# Altium PCB EVB_WUS_V1.0.0.PcbDoc
Units mil, origin at the board's own origin, x right, y up, seen from the top; angles counter-clockwise.
Board outline 6000 x 4000 mil, 2 copper layers (Top, Bottom), stack 12.7 mil thick; 16 components, 6 nets, 77 pads, 82 vias.
Unrouted connection lines stored in the file: 75.
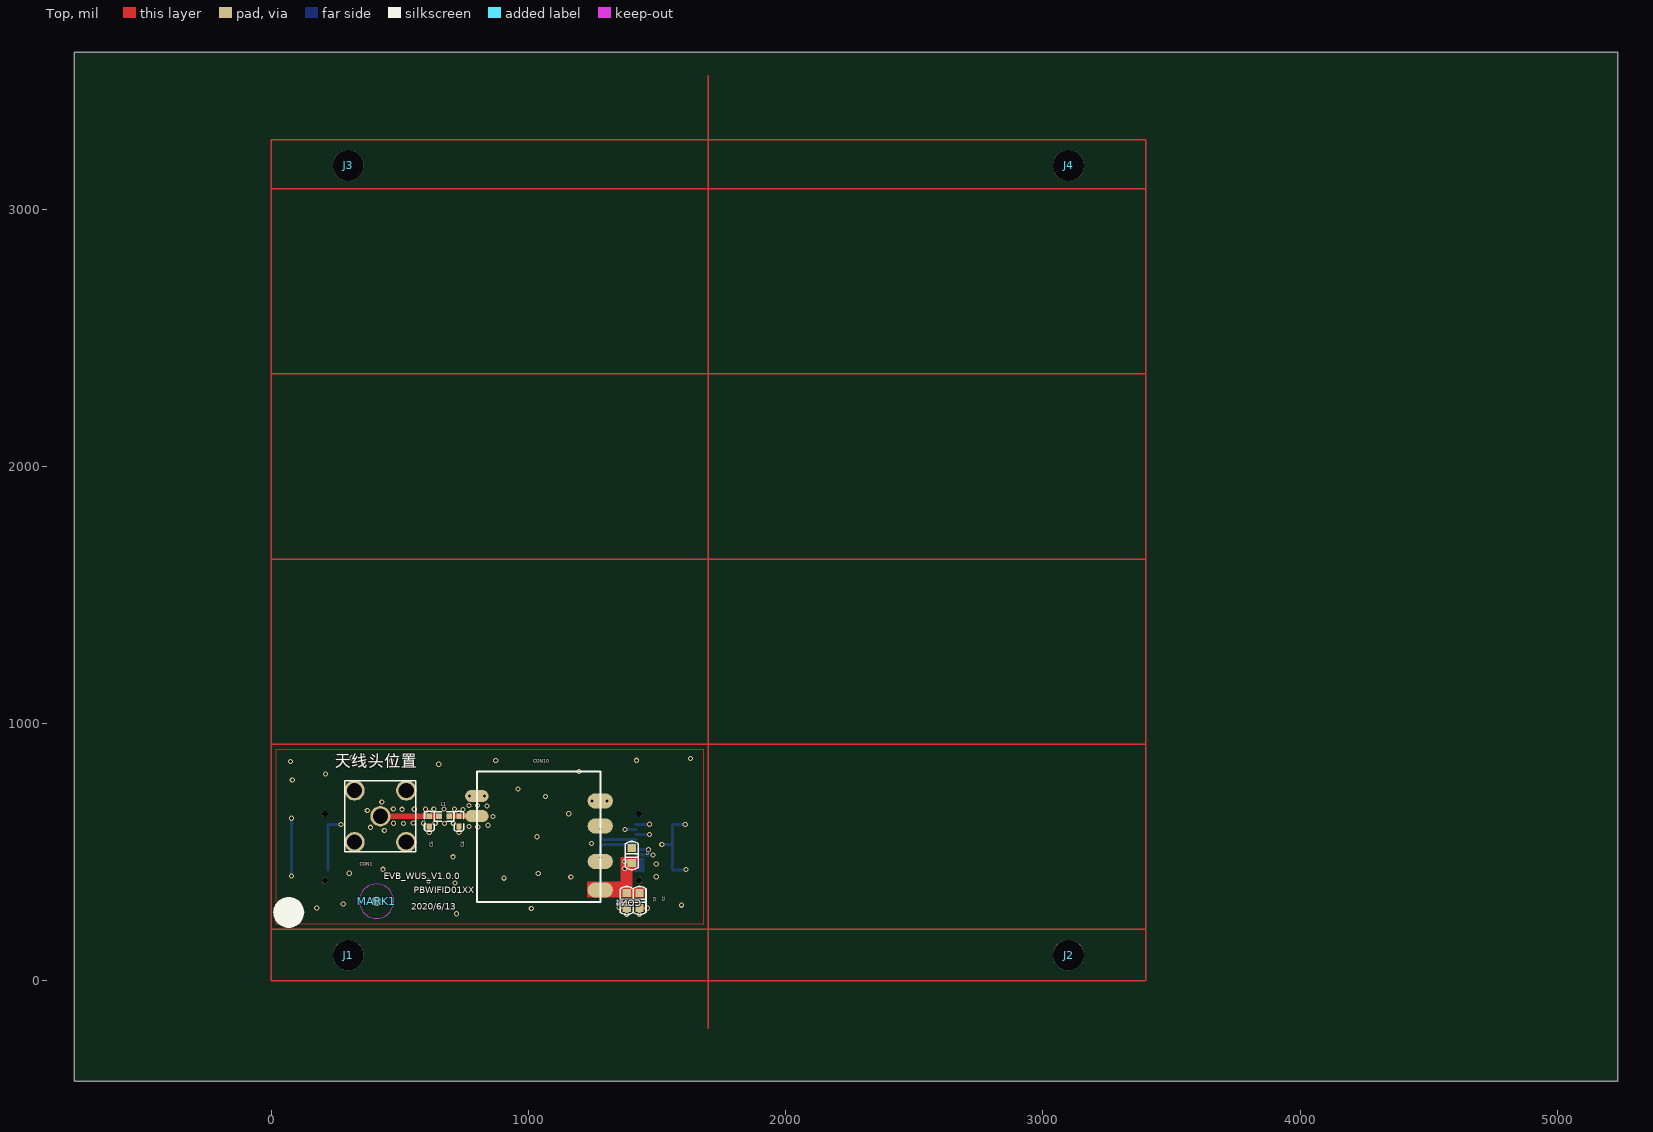
[diagram p0: Top view]
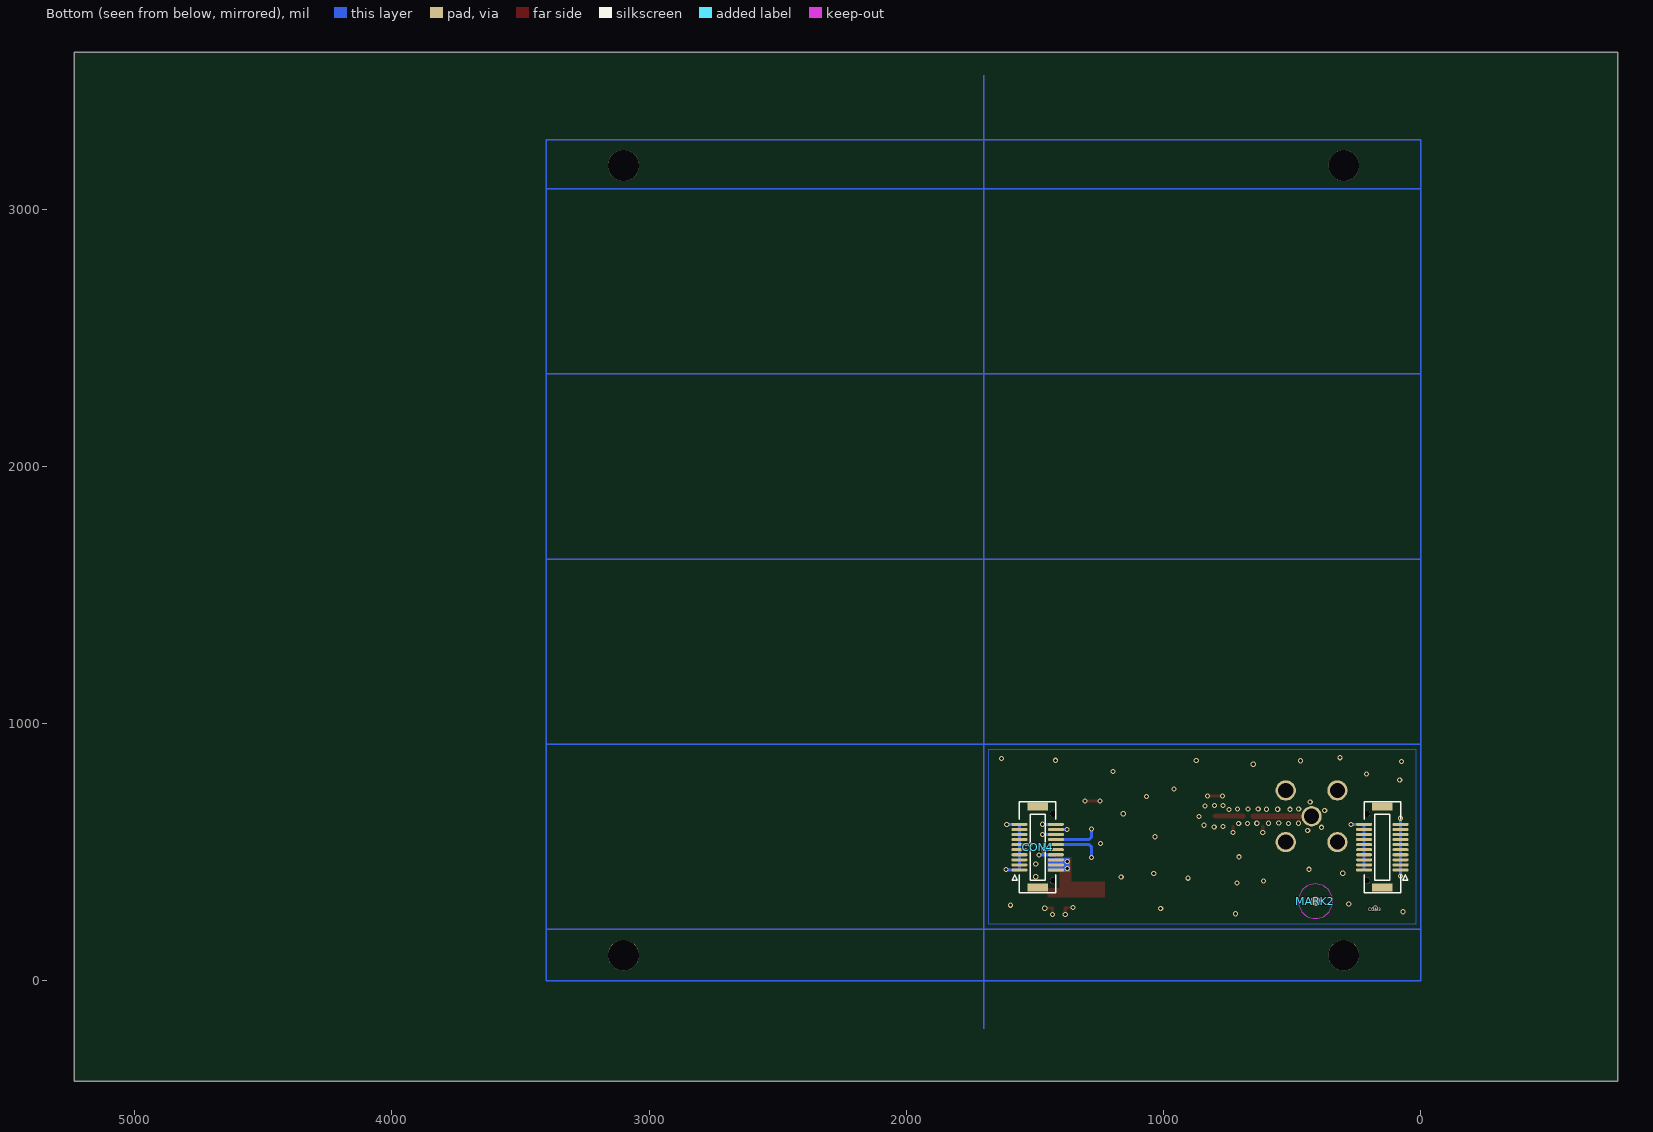
[diagram p1: Bottom view, seen from below]

## Layer stack, top to bottom
Solder Mask Top: solder mask 0.4, Solder Resist, Dk 3.5
Top: signal copper 1.35
Dielectric 1: dielectric 10, FR-4, Dk 4.3
Bottom: signal copper 1.35
Solder Mask Bottom: solder mask 0.4, Solder Resist, Dk 3.5

## Board outline
-765,-390 5235,-390 5235,3610 -765,3610

## Design rules (kind name [scope] priority, off if disabled: settings)
Clearance "Clearance - NetClass - ClearanceClass_2(RuleSet)" [InNetClass('ClearanceClass_2(RuleSet)')] p1: gap=6 ignorepadtopadclearanceinfootprint=FALSE except(0: Arc-Hole Track-Hole SMDPad-Hole THPad-Hole Via-Hole Fill-Hole Poly-Hole Region-Hole Text-Hole; 8: Arc-Fill Arc-Poly Arc-Region Track-Fill Track-Poly Track-Region SMDPad-Fill SMDPad-Poly SMDPad-Region THPad-Fill THPad-Poly THPad-Region Via-Fill Via-Poly Via-Region Fill-Fill Fill-Poly Fill-Region Poly-Poly Poly-Region Region-Region; 10: Text-Text)
Clearance "Clearance - Default - DEFAULT- SMD" [IsVia vs IsSMTPin] p2: gap=6 ignorepadtopadclearanceinfootprint=FALSE
Clearance "Clearance - Default - DEFAULT - Via" [IsVia vs IsVia] p3: gap=6 ignorepadtopadclearanceinfootprint=FALSE
Clearance "Clearance - Default - DEFAULT - Net" [All] p4: gap=6 ignorepadtopadclearanceinfootprint=FALSE except(0: Arc-Hole Track-Hole SMDPad-Hole THPad-Hole Via-Hole Fill-Hole Poly-Hole Region-Hole Text-Hole; 10: Text-Text)
ComponentClearance "ComponentClearance - Default - DEFAULT" [All] p1: gap=6 collisioncheckmode=3 verticalgap=10 showdistances=FALSE
FanoutControl Fanout_Small [(CompPinCount < 5)] p3: bgadir=Out bgaviamode=Centered fanoutstyle=Auto fanoutdirection=OutThenIn viagrid=1 // Fanout_Small (Default Rule)
FanoutControl Fanout_SOIC [IsSOIC] p4: bgadir=Out bgaviamode=Centered fanoutstyle=Auto fanoutdirection=Alternating viagrid=1 // Fanout_SOIC (Default Rule)
HoleToHoleClearance "HoleToHoleClearance - Default - DEFAULT" [All] p1: gap=6 allowstackedmicrovias=TRUE
Length "Default Length" [All] p1: maxlimit=50000 minlimit=0
MaxMinImpedance "Default Impedance" [All] p1: minimum=50.00 maximum=150.0
ParallelSegment "Default Parallel Segment Same Layer" [All] p1: limit=1000 gap=200
ParallelSegment "Default Parallel Segment Adjasent" [All] p2: limit=1000 gap=200
PlaneConnect "Default PlaneConnect" [All] p1: planeconnectstyle=Relief reliefexpansion=20 reliefentries=4 reliefconductorwidth=15 reliefairgap=10
PolygonConnect "PolygonConnect - Default SMT" [IsSMTPin] p1: connectstyle=Direct reliefconductorwidth=10 reliefentries=4 polygonreliefangle="45 Angle" airgapwidth=10
PolygonConnect "PolygonConnect - Default Pad" [All] p2: connectstyle=Relief reliefconductorwidth=15 reliefentries=4 polygonreliefangle="45 Angle" airgapwidth=10
RoutingLayers "RoutingLayers - Default - DEFAULT" [All] p1: top layer_v5=TRUE bottom layer_v5=TRUE
RoutingPriority "RoutingPriority - Default - DEFAULT" [All] p1: routingpriority=3
RoutingTopology "Default Routing Topology" [All] p1: topology=Shortest
RoutingVias "RoutingVias - Default - DEFAULT" [All] p1: holewidth=12 width=20 viastyle="Through Hole" minholewidth=12 minwidth=20 maxholewidth=12 maxwidth=20
SMDToCorner "SMDToCorner - Default - DEFAULT" [All] p1: distance=60000
SolderMaskExpansion [All] p1: expansion=4 istentingtop=FALSE
Width "Default Width" [All] p1: maxlimit=100 minlimit=5 preferedwidth=12
20 further rules are at their usual default settings.

## Classes and differential pairs
net class ClearanceClass_2(RuleSet): WIFI_3V3 WIFI_DM WIFI_DP

## Components (designator, comment, footprint, x,y, rotation, side; value= is the part's Value field where it differs from the comment)
C1 "C0603" C0603 1402.5,487.5 r270 top
C2 "C0603" C0603 1432.5,312.5 r90 top
C3 "C0603" C0603 1382.5,312.5 r90 top
C4 "C0402" C0402 730,620 r270 top
C5 "C0402" C0402 615,620 r270 top
CON1 "SMA-KHD-92105001" SMA-KHD-92105001 425,640 r0 top
CON3 "CON10X2_0MM5_BTB_DF12" CON10X2_0MM5_BTB_DF12 150,520 r90 bottom
CON4 "CON10X2_0MM5_BTB_DF12_BOTTOM" CON10X2_0MM5_BTB_DF12_BOTTOM 1490,520 r90 top
CON10 "RL-UM02BS" RL-UM02BS 1040,560 r0 top
J1 "SCREWING_H_3MM" SCREWING_H_3MM 300,100 r270 top
J2 "SCREWING_H_3MM" SCREWING_H_3MM 3100,100 r270 top
J3 "SCREWING_H_3MM" SCREWING_H_3MM 300,3170 r270 top
J4 "SCREWING_H_3MM" SCREWING_H_3MM 3100,3170 r270 top
L1 "L0402" L0402 672.5,640 r180 top
MARK1 "MARK" MARK 410,310 r270 top
MARK2 "MARK" MARK 410,310 r270 bottom

## Footprints (in the part's own frame and the unit in brackets; to place one, negate y for a bottom-side part, rotate by r counter-clockwise, add the part's x,y. Pads: shape width x height; smd on the part's side, far side on the other; paste and mask are expansions set on the pad)
C0402 [mil]
  rect 22x20 smd: 1(-20,0) 2(20,0)
  silkscreen extent -39,-19 39,19
C0603 [mil]
  rect 30x32 smd: 1(-29,0) 2(29,0)
  silkscreen extent -55,-25 55,25
CON10X2_0MM5_BTB_DF12 [mm]
  oval 0.3x1.6 smd: 1(-2.25,-1.8) 2(-2.25,1.8) 3(-1.75,-1.8) 4(-1.75,1.8) 5(-1.25,-1.8) 6(-1.25,1.8) 7(-0.75,-1.8) 8(-0.75,1.8) 9(-0.25,-1.8) 10(-0.25,1.8) 11(0.25,-1.8) 12(0.25,1.8) 13(0.75,-1.8) 14(0.75,1.8) 15(1.25,-1.8) 16(1.25,1.8) 17(1.75,-1.8) 18(1.75,1.8) 19(2.25,-1.8) 20(2.25,1.8)
  rect 0.8x2 smd: 21(-4,0) 22(4,0)
  round 0.6 hole 0.6 unplated: 23(-3.3,1.5) 24(3.3,1.5)
  silkscreen extent -4.5,-2.5 4.5,1.8
CON10X2_0MM5_BTB_DF12_BOTTOM [mm]
  oval 0.3x1.6 smd far side: 1(-2.25,-1.8) 2(-2.25,1.8) 3(-1.75,-1.8) 4(-1.75,1.8) 5(-1.25,-1.8) 6(-1.25,1.8) 7(-0.75,-1.8) 8(-0.75,1.8) 9(-0.25,-1.8) 10(-0.25,1.8) 11(0.25,-1.8) 12(0.25,1.8) 13(0.75,-1.8) 14(0.75,1.8) 15(1.25,-1.8) 16(1.25,1.8) 17(1.75,-1.8) 18(1.75,1.8) 19(2.25,-1.8) 20(2.25,1.8)
  rect 0.8x2 smd far side: 21(-4,0) 22(4,0)
  round 0.6 hole 0.6 unplated: 23(-3.3,1.5) 24(3.3,1.5)
L0402 [mil]
  rect 22x20 smd: 1(-20,0) 2(20,0)
  silkscreen extent -38,-19 38,19
MARK [mm]
  round 1 smd: 1(0,0)
  Top keep-out region: 1.7,0 1.571,0.651 1.202,1.202 0.651,1.571 0,1.7 0,1.7 -0.651,1.571 -1.202,1.202 -1.571,0.651 -1.7,0 -1.7,0 -1.571,-0.651 -1.202,-1.202 -0.651,-1.571 0,-1.7 0,-1.7 0.651,-1.571 1.202,-1.202 1.571,-0.651 1.7,0
RL-UM02BS [mm]
  oval 2.5x1.5 smd: 1(6.092,-5.25) 2(6.092,-2.429) 3(6.092,1.072) 4(6.092,3.55)
  oval 2.3x1.2 smd: 5(-6.1,4.028) 6(-6.1,2.05)
  silkscreen extent -6.1,-6.45 6.09,6.45
SCREWING_H_3MM [mil]
  round 120 hole 120 unplated: 1(0,0)
SMA-KHD-92105001 [mil]
  round 78.7 hole 59.06: 1(0,0) 2(-100.39,100.39) 3(100.39,100.39) 4(-100.39,-100.39) 5(100.39,-100.39)
  silkscreen extent -138,-138 138,138

## Via types
v1: diameter 20, hole 12, Top to Bottom, 82 vias

## Nets (pads, with @x,y where several pads share a name; then routed paths per layer and width w, separated by ;. In a path a pad name is that pad's centre, name@x,y a point inside that pad or via, vN(x,y) a via of type N, cw(c..) or ccw(c..) an arc to the next point about the centre after c; other vN are vias at no path point)
$$$2156: C5.1 CON1.1 L1.2 | length 265
  Top w20: CON1.1 L1.2 C5.1
$$$14942: C4.1 CON10.6 L1.1 | length 107.3
  Top w20: L1.1 725.7,640.7 CON10.6
GND: C1.1 C2.1 C3.1 C4.2 C5.2 CON1.2 CON1.3 CON1.4 CON1.5 CON3.1 CON3.2 CON3.3 CON3.4 CON3.5 CON3.6 CON3.7 CON3.8 CON3.9 CON3.10 CON3.11 CON3.12 CON3.13 CON3.14 CON3.15 CON3.16 CON3.17 CON3.18 CON3.19 CON3.20 CON4.1 CON4.3 CON4.5 CON4.7 CON4.8 CON4.9 CON4.10 CON4.11 CON4.13 CON4.15 CON4.16 CON4.17 CON4.18 CON4.19 CON4.20 CON10.4 CON10.5 | length 1309.5
  Top w12: v1(615,577.5) C5.2 ; v1(730,577.5) C4.2 ; v1(772,719) 772.42,718.58 CON10.5 828.58,718.58 v1(829,719) ; v1(1248,700) 1248.24,699.76 CON10.4 1305.76,699.76 v1(1306,700) ; v1(1352.5,285) C3.1 v1(1382.5,257.5) ; v1(1432.5,257.5) C2.1 v1(1462.5,282.5)
  Bottom w12: v1(80,407.5) 79.13,408.37 CON3.1 CON3.3 CON3.5 CON3.7 CON3.9 CON3.11 CON3.13 CON3.15 CON3.17 CON3.19 79.13,631.63 v1(80,632.5) ; CON3.2 CON3.4 CON3.6 CON3.8 CON3.10 CON3.12 CON3.14 CON3.16 CON3.18 CON3.20 271.42,608.58 v1(272.5,607.5) ; v1(1376,589) 1376.1,588.9 CON4.18 ; CON4.8 1484.53,490.47 v1(1485,490) ; CON4.10 1466.84,510.16 v1(1467,510) ; CON4.16 1470.79,569.21 v1(1471,569) ; CON4.20 1470.58,608.58 v1(1471,609) ; v1(1519,530) 1519.16,529.84 CON4.11 ; v1(1610,607.5) 1608.92,608.58 CON4.19 CON4.11 ; v1(1612.5,432.5) 1611.42,431.42 CON4.1 CON4.11
  other v1: 721.05,261.06 69.51,268.74 1011.62,281.54 177.5,283.37 1595.32,294.34 280.72,299.46 715.54,380.86 612.25,389.06 905.38,399.3 1165.23,404.42 1497.5,405 1038.5,417.22 303.76,418.5 435.6,433.86 1497.5,455 706.97,482.5 1246.07,534.44 1033.38,560.59 440.22,585.04 387.17,597.17 803.66,598.67 769.34,600.88 842.6,605.13 514.44,612.16 674.49,612.33 475.9,612.87 552.58,613.22 591.88,612.87 637.96,612.88 708.45,612.51 862.71,638.9 1157.33,649.88 374.08,661.88 509.45,667.11 556.79,667.35 599.79,667.25 746.27,666.76 475.19,668.06 632.6,667.68 672.83,667.87 713.43,668.05 839.83,679.31 769.34,681.34 803.11,681.71 430.46,695.9 1066.66,716.75 959.88,746.13 82.48,780.68 212.06,804.13 1197.23,814.03 651.93,842.19 75.91,852.43 467.5,855.96 873.38,856.28 1419.95,857.56 1631.16,863.96 314,867.8
WIFI_3V3: C1.2 C2.2 C3.2 CON4.2 CON4.4 CON4.6 CON10.1
  other v1: 1375,437 1375,464
WIFI_DM: CON4.12 CON10.2 | length 183.1
  Bottom w12: v1(1280,480) 1280,519.84 1290,529.84 CON4.12
WIFI_DP: CON4.14 CON10.3 | length 173.7
  Bottom w12: v1(1280,590) 1280,559.53 1290,549.53 CON4.14
pads on no net: CON3.21 CON3.22 CON3.23 CON3.24 CON4.21 CON4.22 CON4.23 CON4.24 J1.1 J2.1 J3.1 J4.1 MARK1.1 MARK2.1

## Polygon pours and split planes (outlines as drawn)
GND on Top (solid, remove dead copper, pour order 0): 20,900 1680,900 1680,220 20,220
GND on Bottom (solid, remove dead copper, pour order 1): 1680,900 20,900 20,220 1680,220

## Other copper
Top:
  region net WIFI_3V3: 1422.5,480 1360,480 1360,385 1230,385 1230,325 1405,325 1405,430 1422.5,430 1422.5,480
  region net WIFI_3V3: 1450,360 1230,360 1230,325 1450,325 1450,360
Bottom:
  region net WIFI_3V3: 1451,476 1365,476 1365,425 1451,425 1451,476
Multi-Layer:
  lines w5: 1700,-185 1700,200 ; 1700,3520 1700,3080 ; 0,200 0,0 3400,0 3400,200 ; 0,200 3400,200 ; 0,200 0,920 ; 0,200 1700,200 ; 0,920 1700,920 ; 0,920 0,1640 ; 0,920 1700,920 ; 0,1640 1700,1640 ; 0,1640 0,2360 ; 0,1640 1700,1640 ; 0,2360 0,3080 ; 0,2360 1700,2360 ; 0,2360 1700,2360 ; 0,3080 1700,3080 ; 0,3080 0,3270 3400,3270 3400,3080 ; 0,3080 3400,3080 ; 1700,200 1700,920 ; 1700,200 1700,920 ; 1700,200 3400,200 ; 1700,920 1700,1640 ; 1700,920 1700,1640 ; 1700,920 3400,920 ; 1700,920 3400,920 ; 1700,1640 1700,2360 ; 1700,1640 3400,1640 ; 1700,1640 3400,1640 ; 1700,1640 1700,2360 ; 1700,2360 3400,2360 ; 1700,2360 1700,3080 ; 1700,2360 1700,3080 ; 1700,2360 3400,2360 ; 1700,3080 3400,3080 ; 3400,200 3400,920 ; 3400,920 3400,1640 ; 3400,1640 3400,2360 ; 3400,2360 3400,3080

## Silkscreen, mask and mechanical layers (free items; w line width, h text height)
Silkscreen Top:
  region: 127.98,266.5 ccw(c68.5,266.5) 68.5,325.98 ccw(c68.5,266.5) 9.02,266.5 ccw(c68.5,266.5) 68.5,207.02 ccw(c68.5,266.5)
  text "天线头位置" at 247.5,817.5 h80
  text "EVB_WUS_V1.0.0" at 437.5,395 h25
  text "PBWIFID01XX" at 555.56,340 h25
  text "2020/6/13" at 545,277.5 h25